# Altium PCB 底盘扩展版.PcbDoc
Units mil, origin at the board's own origin, x right, y up, seen from the top; angles counter-clockwise.
Board outline 2361.05 x 1850 mil, 2 copper layers (Top Layer, Bottom Layer); 38 components, 88 nets, 227 pads, 64 vias.
Unrouted connection lines stored in the file: 37.
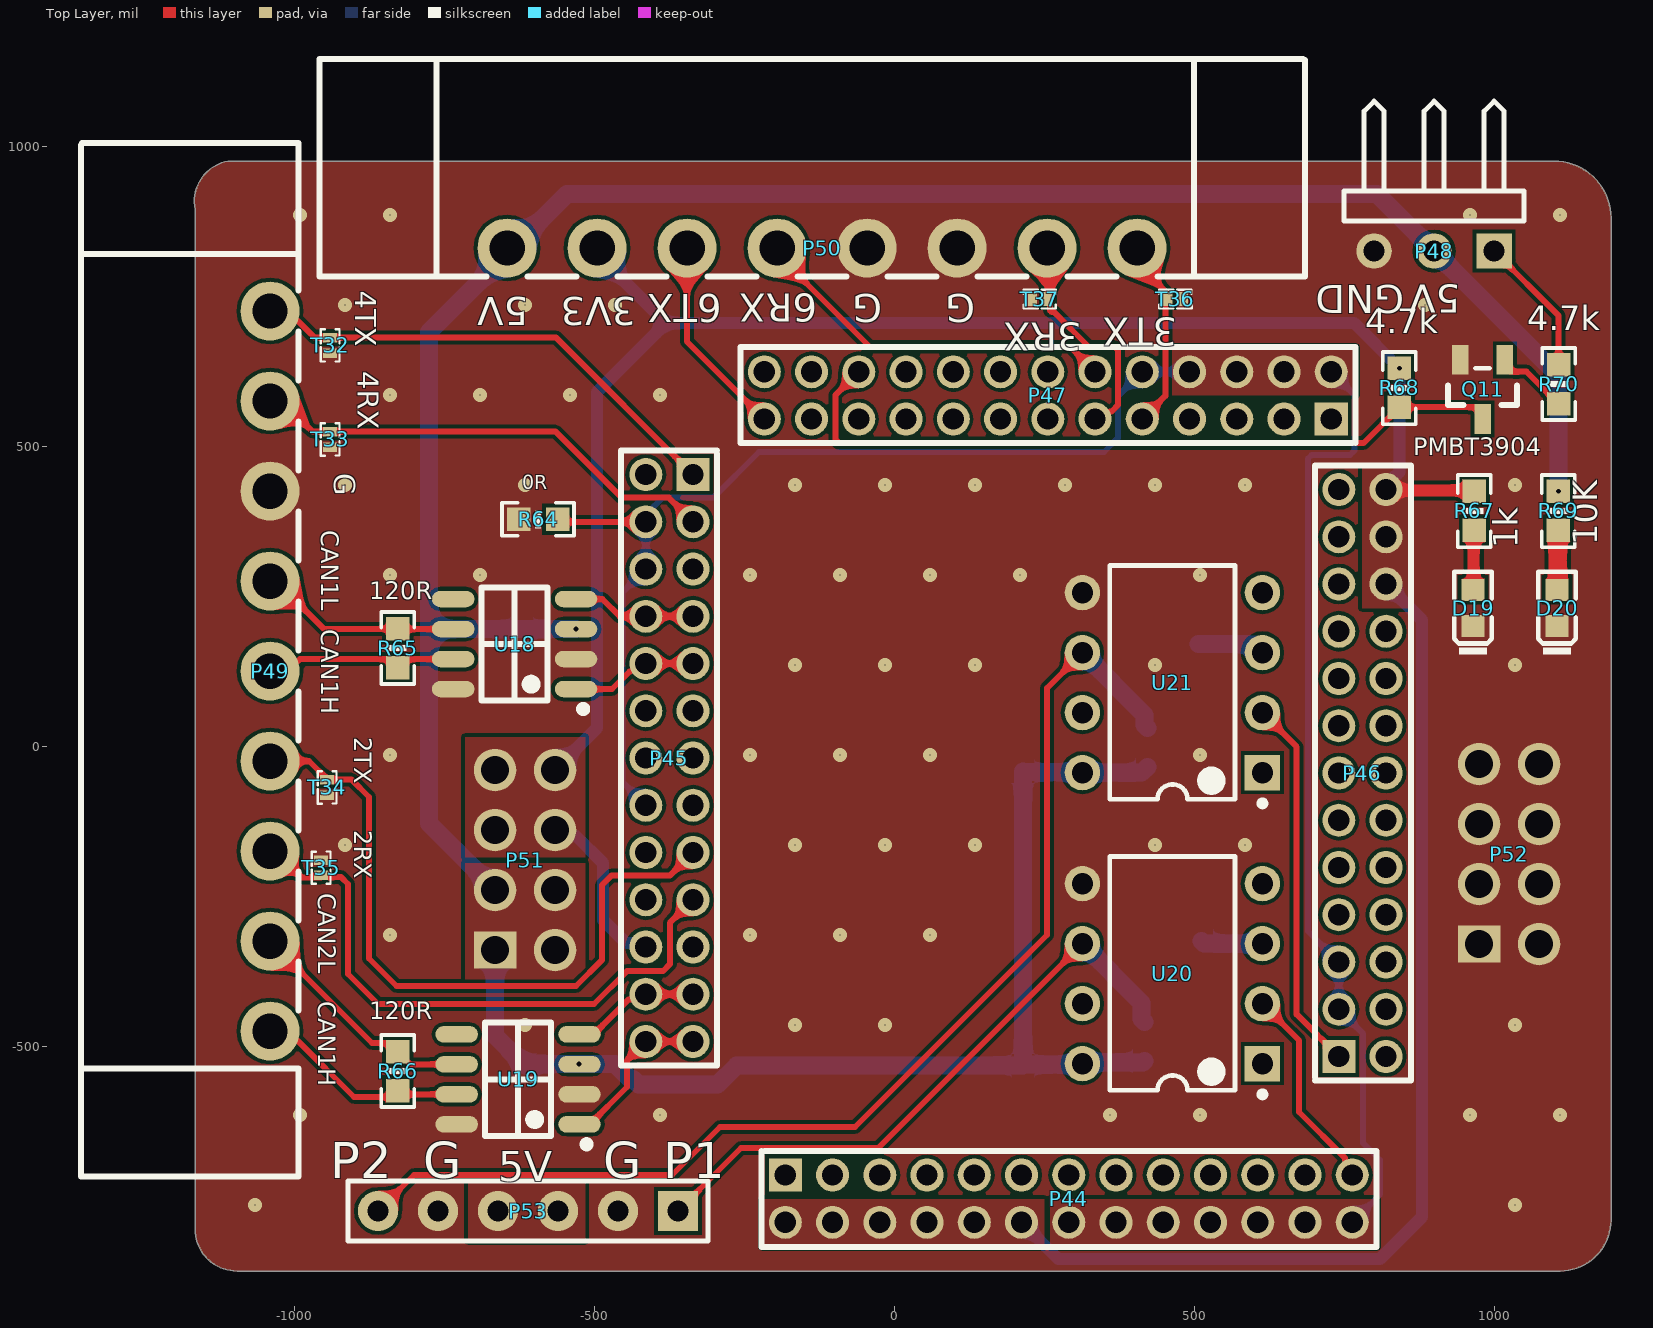
[diagram p0: Top Layer view]
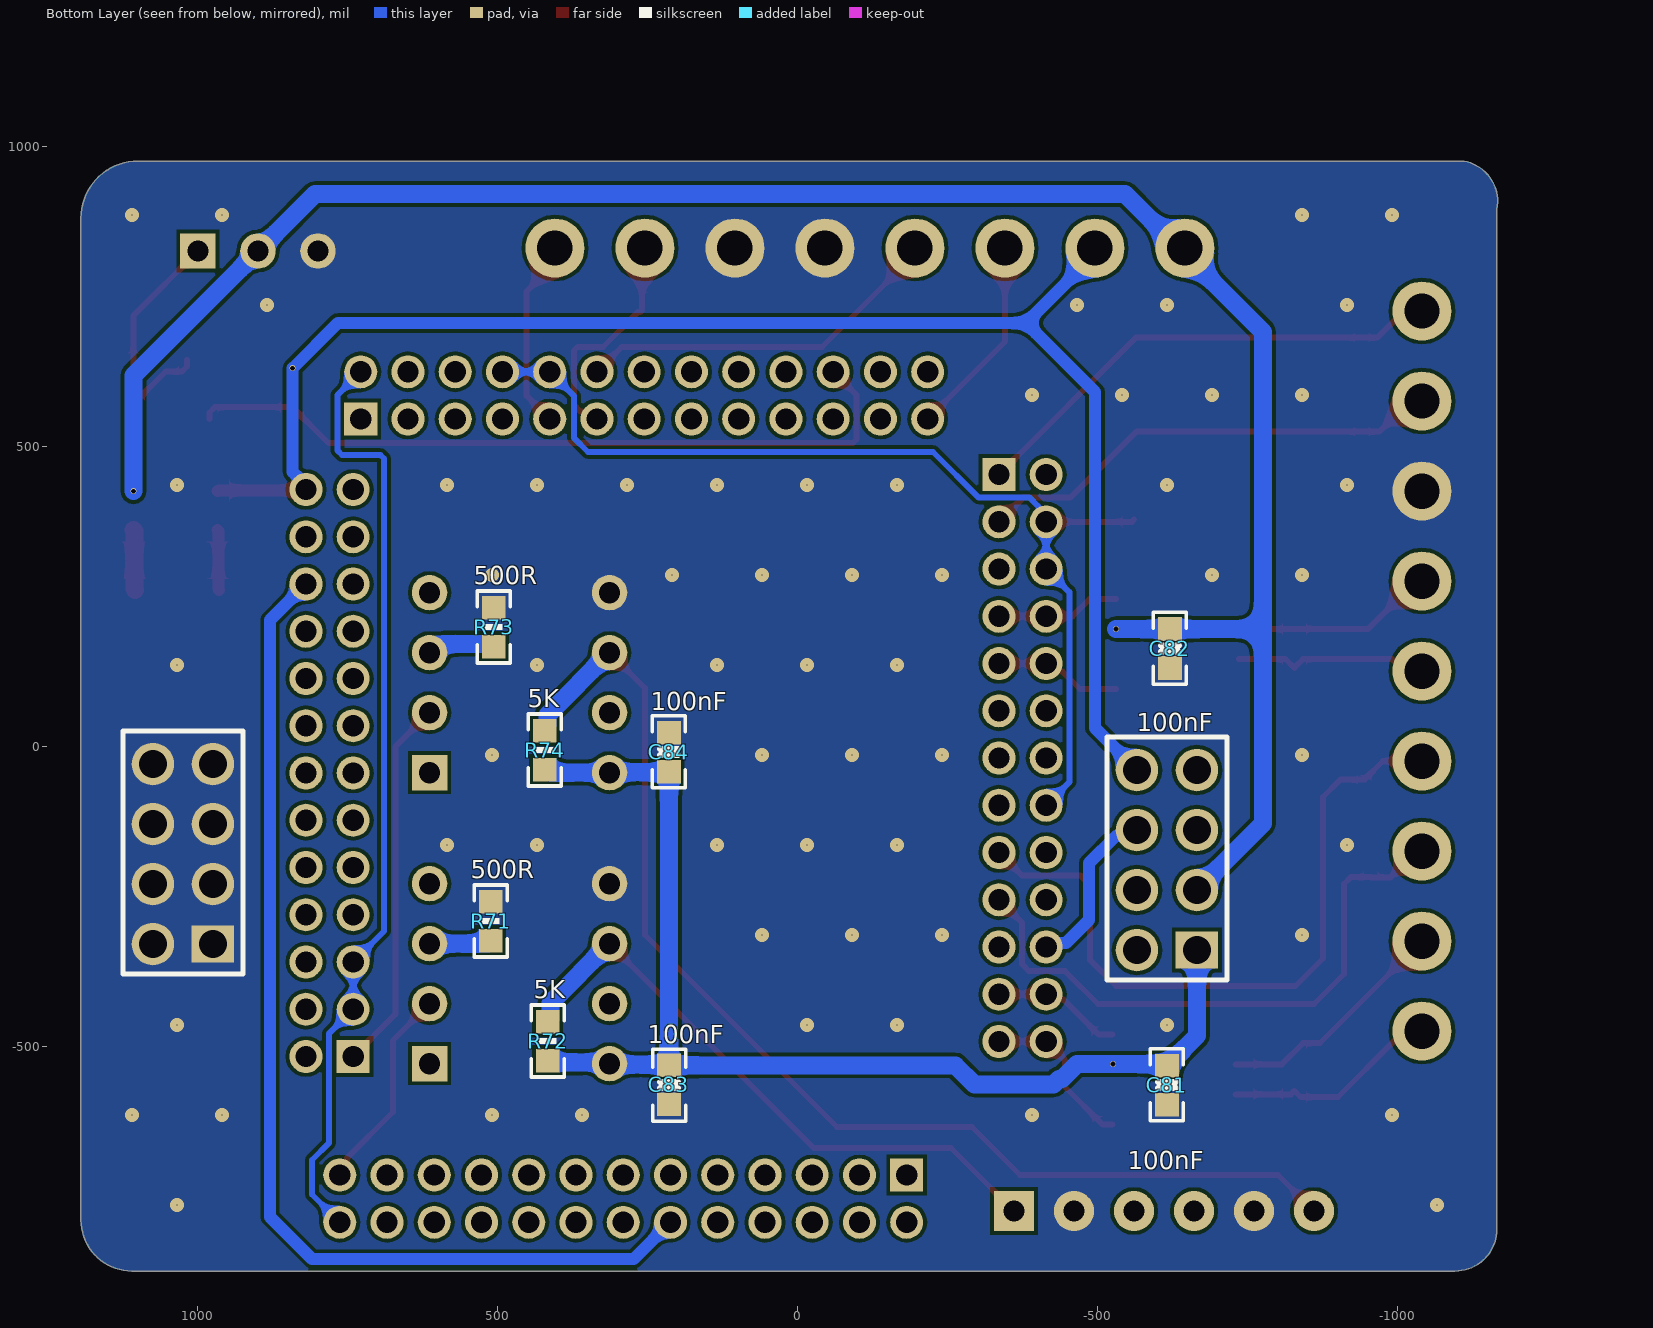
[diagram p1: Bottom Layer view, seen from below]
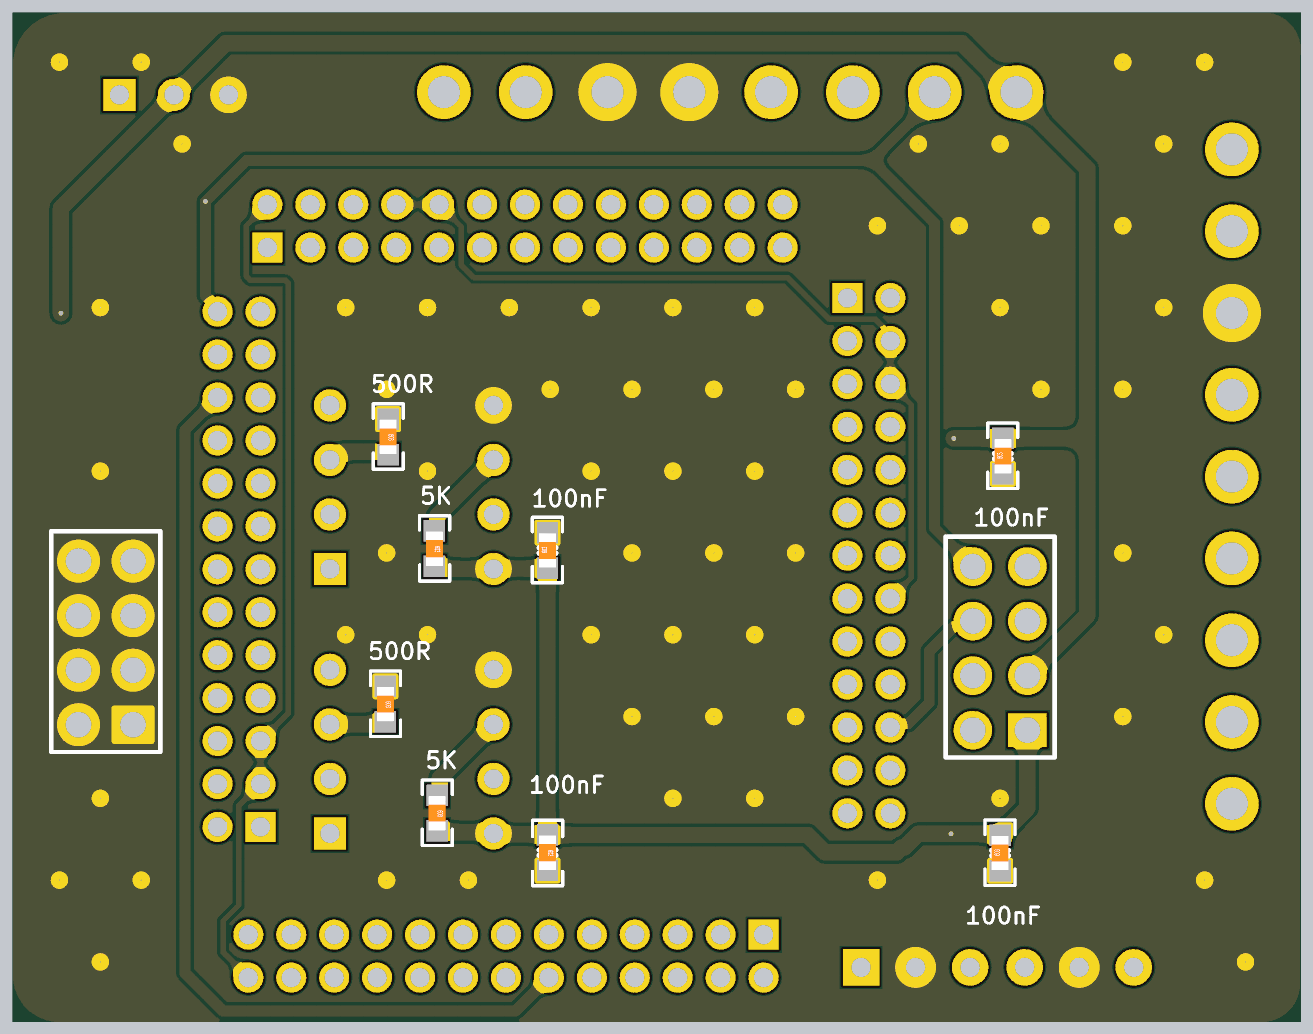
[diagram p2: 3D render of the assembled board from below, using the file's embedded part models]

## Layer stack, top to bottom
Top Solder: solder mask 0.4, Solder Resist, Dk 3.5
Top Layer: signal copper 1.4
Dielectric 1: dielectric 12.6, FR-4, Dk 4.8
Bottom Layer: signal copper 1.4
Bottom Solder: solder mask 0.4, Solder Resist, Dk 3.5

## Board outline
-1165,-805 -1165,895 cw(c-1097.5,907.5) -1110,975 1100,975 cw(c1100,880) 1195,880 1195,-790 cw(c1110,-790) 1110,-875 -1095,-875 cw(c-1095,-805)

## Design rules (kind name [scope] priority, off if disabled: settings)
Clearance [All] p1: gap=6 ignorepadtopadclearanceinfootprint=FALSE
PlaneConnect [All] p1: planeconnectstyle=Direct reliefexpansion=20 reliefentries=4 reliefconductorwidth=10 reliefairgap=10
PolygonConnect PolygonConnect_4 [All vs IsNamedPolygon('3.3V_L01_P005')] p1: thpad.connectstyle=Direct thpad.reliefconductorwidth=10 thpad.reliefentries=4 thpad.polygonreliefangle="90 Angle" thpad.airgapwidth=10 smdpad.connectstyle=Direct smdpad.reliefconductorwidth=10 smdpad.reliefentries=4 smdpad.polygonreliefangle="90 Angle" smdpad.airgapwidth=10 via.connectstyle=Relief via.reliefconductorwidth=10 via.reliefentries=4 via.polygonreliefangle="90 Angle" via.airgapwidth=10
PolygonConnect PolygonConnect_3 [All vs IsNamedPolygon('PGND_L01_P004')] p2: thpad.connectstyle=Direct thpad.reliefconductorwidth=10 thpad.reliefentries=4 thpad.polygonreliefangle="90 Angle" thpad.airgapwidth=10 smdpad.connectstyle=Direct smdpad.reliefconductorwidth=10 smdpad.reliefentries=4 smdpad.polygonreliefangle="90 Angle" smdpad.airgapwidth=10 via.connectstyle=Relief via.reliefconductorwidth=10 via.reliefentries=4 via.polygonreliefangle="90 Angle" via.airgapwidth=10
PolygonConnect PolygonConnect_2 [All vs IsNamedPolygon('3.3V_L01_P002')] p3: thpad.connectstyle=NoConnect thpad.reliefconductorwidth=10 thpad.reliefentries=4 thpad.polygonreliefangle="90 Angle" thpad.airgapwidth=10 smdpad.connectstyle=NoConnect smdpad.reliefconductorwidth=10 smdpad.reliefentries=4 smdpad.polygonreliefangle="90 Angle" smdpad.airgapwidth=10 via.connectstyle=Relief via.reliefconductorwidth=10 via.reliefentries=4 via.polygonreliefangle="90 Angle" via.airgapwidth=10
PolygonConnect PolygonConnect_1 [All vs IsNamedPolygon('PGND_L01_P001')] p4: thpad.connectstyle=Direct thpad.reliefconductorwidth=10 thpad.reliefentries=4 thpad.polygonreliefangle="90 Angle" thpad.airgapwidth=10 smdpad.connectstyle=Direct smdpad.reliefconductorwidth=10 smdpad.reliefentries=4 smdpad.polygonreliefangle="90 Angle" smdpad.airgapwidth=10 via.connectstyle=Relief via.reliefconductorwidth=10 via.reliefentries=4 via.polygonreliefangle="90 Angle" via.airgapwidth=10
PolygonConnect [All] p5: connectstyle=Direct reliefconductorwidth=10 reliefentries=4 polygonreliefangle="90 Angle" airgapwidth=10
RoutingVias [All] p1: holewidth=28 width=50 viastyle="Through Hole" minholewidth=28 minwidth=50 maxholewidth=28 maxwidth=50
SolderMaskExpansion [All] p1: expansion=4 istentingtop=FALSE
Width [All] p1: maxlimit=60 minlimit=10 preferedwidth=30
29 further rules are at their usual default settings.

## Components (designator, comment, footprint, x,y, rotation, side; value= is the part's Value field where it differs from the comment)
C81 "100nF/50V/0603" "0603C  1   2" -615,-565 r0 bottom
C82 "100nF/50V/0603" "0603C  1   2" -620,162.82 r0 bottom
C83 "100nF" "0603C  1   2" 215,-565 r180 bottom
C84 "100nF" "0603C  1   2" 215,-10 r0 bottom
D19 "绿灯 0603" 0603_LED_S1 970,225 r0 top
D20 "绿灯 0603" 0603_LED_S1 1110,225 r0 top
P44 "排针排母" "排针 13*2 2.54 立式 -1" 245,-755 r0 top
P45 "排针排母" "排针 13*2 2.54 立式" -360,-60 r0 top
P46 "排针排母" "排针 13*2 2.54 立式 -2" 801.61,-95.62 r0 top
P47 "排针排母" "排针 13*2 2.54 立式 -3" 221.59,584.24 r0 top
P48 "DBUS" HDR1X3H 1000,825 r180 top
P49 "绿色端子 10P" 绿色端子9p -1117.96,134.81 r0 top
P50 "绿色端子 8P" 绿色端子8p -135,1055 r0 top
P51 "排针排母" HDR-TH_16P-P2.54-V-M-R2-C8-S2.54 -630.51,-203.63 r0 top
P52 "排针排母" HDR-TH_16P-P2.54-V-M-R2-C8-S2.54 1009.49,-193.63 r0 top
P53 "排针排母" 排针6P -610,-775 r0 top
Q11 "PMBT3904" SOT-23(SOT-23-3) 980,595 r0 top
R64 "0R" 0603(偏大) -595,375 r0 top
R65 "120R/1%/0603" 0603(偏大) -830,165 r270 top
R66 "120R/1%/0603" 0603(偏大) -830,-540 r270 top
R67 "1K" 0603(偏大) 970,390 r90 top
R68 "4.7k/1%/0603" 0603(偏大) 845,595 r90 top
R69 "10K" 0603(偏大) 1110,390 r90 top
R70 "4.7k/1%/0603" 0603(偏大) 1105,605 r270 top
R71 "200R" 0603(偏大) 515,-290 r270 bottom
R72 "5K" 0603(偏大) 420,-490 r270 bottom
R73 "200R" 0603(偏大) 510,200 r270 bottom
R74 "5K" 0603(偏大) 425,-5 r270 bottom
T32 "PESD5V0V1BL" ESD -940,666.74 r0 top
T33 "PESD5V0V1BL" ESD -940,510 r0 top
T34 "PESD5V0V1BL" ESD -945,-70 r0 top
T35 "PESD5V0V1BL" ESD -955,-201.74 r180 top
T36 "PESD5V0V1BL" ESD 470,745 r90 top
T37 "PESD5V0V1BL" ESD 241.74,745 r270 top
U18 "CAN/TJA1040T/CM" SOIC-8_150mil -660.79,140.51 r0 top
U19 "CAN/TJA1040T/CM" SOIC-8_150mil -655,-585 r0 top
U20 "6N135_C255739" 光耦 475,-385 r0 top
U21 "6N135_C255739" 光耦 475,100 r0 top

## Footprints (in the part's own frame and the unit in brackets; to place one, negate y for a bottom-side part, rotate by r counter-clockwise, add the part's x,y. Pads: shape width x height; smd on the part's side, far side on the other; paste and mask are expansions set on the pad)
0603(偏大) [mm]
  rect 1x1 smd: 1(-0.77,0.069) 2(0.881,0.069)
  silkscreen extent -1.48,-0.62 1.57,0.78, body extent -0.74,-0.33 0.86,0.47, height 0.3
0603_LED_S1 [mm]
  rect 0.98x0.93 smd: A(-0.127,0.897) K(-0.127,-0.643)
  silkscreen extent -0.92,-1.85 0.66,1.66, body extent -0.53,-0.67 0.27,0.93, height 0.6
"0603C  1   2" [mm]
  rect 1x1 smd: 1(0,-0.817) 2(0,0.834)
  silkscreen extent -0.69,-1.53 0.71,1.52, body extent -0.4,-0.79 0.4,0.81, height 0.3
ESD [mm]
  rect 0.6x0.4 smd: 1(0,0.352) 2(0,-0.298)
  silkscreen extent -0.4,-0.66 0.4,0.71
HDR1X3H [mm] "Connector; Header; 3 Position; Right Angle"
  rect 1.5x1.5 hole 0.9: 1(0,0)
  round 1.5 hole 0.9: 2(2.54,0) 3(5.08,0)
  silkscreen extent -1.27,-6.35 6.35,-1.27
HDR-TH_16P-P2.54-V-M-R2-C8-S2.54 [mm]
  rect 1.8x1.575 hole 1.2: 1(-0.876,-3.464)
  round 1.8 hole 1.2: 2(-0.876,-0.924) 3(-0.876,1.616) 4(-0.876,4.156) 5(1.664,4.156) 6(1.664,1.616) 7(1.664,-0.924) 8(1.664,-3.464)
SOIC-8_150mil [mm]
  oval 1.8x0.7 smd: 1(3.322,-1.156) 2(3.322,0.114) 3(3.322,1.384) 4(3.322,2.654) 5(-1.878,2.654) 6(-1.878,1.384) 7(-1.878,0.114) 8(-1.878,-1.156)
  silkscreen extent -0.68,-2.15 3.77,3.15, body extent -2.2,-1.77 3.84,3.25, height 1.6
SOT-23(SOT-23-3) [mm]
  rect 0.7x1.25 smd: 1(0.97,1.231) 2(-0.93,1.231) 3(0.02,-1.269)
  silkscreen extent -1.44,-0.67 1.48,0.88, body extent -1.48,-1.52 1.52,1.48, height 1.3
光耦 [mm]
  rect 1.5x1.5 hole 0.9: 1(3.531,-3.667)
  round 1.5 hole 0.9: 2(3.531,-1.127) 3(3.531,1.413) 4(3.531,3.953) 5(-4.089,3.953) 6(-4.089,1.413) 7(-4.089,-1.127) 8(-4.089,-3.667)
  silkscreen extent -2.93,-5.09 3.65,5.1
排针6P [mm]
  rect 1.7x1.7 hole 0.9: 1(6.35,0)
  round 1.7 hole 0.9: 2(3.81,0) 3(1.27,0) 4(-1.27,0) 5(-3.81,0) 6(-6.35,0)
  silkscreen extent -7.62,-1.27 7.62,1.27
"排针 13*2 2.54 立式" [mm]
  rect 1.4x1.4 hole 0.9: 1(0.635,13.016)
  round 1.4 hole 0.9: 2(0.635,11.016) 3(0.635,9.016) 4(0.635,7.016) 5(0.635,5.016) 6(0.635,3.016) 7(0.635,1.016) 8(0.635,-0.984) 9(0.635,-2.984) 10(0.635,-4.984) 11(0.635,-6.984) 12(0.635,-8.984) 13(0.635,-10.984) 14(-1.365,-10.984) 15(-1.365,-8.984) 16(-1.365,-6.984) 17(-1.365,-4.984) 18(-1.365,-2.984) 19(-1.365,-0.984) 20(-1.365,1.016) 21(-1.365,3.016) 22(-1.365,5.016) 23(-1.365,7.016) 24(-1.365,9.016) 25(-1.365,11.016) 26(-1.365,13.016)
  silkscreen extent -2.41,-12 1.65,14.03
"排针 13*2 2.54 立式 -1" [mm]
  round 1.4 hole 0.9: 1(-10.826,-0.984) 2(-8.826,-0.984) 3(-6.826,-0.984) 4(-4.826,-0.984) 5(-2.826,-0.984) 6(-0.826,-0.984) 7(1.174,-0.984) 8(3.174,-0.984) 9(5.174,-0.984) 10(7.174,-0.984) 11(9.174,-0.984) 12(11.174,-0.984) 13(13.174,-0.984) 14(13.174,1.016) 15(11.174,1.016) 16(9.174,1.016) 17(7.174,1.016) 18(5.174,1.016) 19(3.174,1.016) 20(1.174,1.016) 21(-0.826,1.016) 22(-2.826,1.016) 23(-4.826,1.016) 24(-6.826,1.016) 25(-8.826,1.016)
  rect 1.4x1.4 hole 0.9: 26(-10.826,1.016)
  silkscreen extent -11.84,-2.03 14.19,2.03
"排针 13*2 2.54 立式 -2" [mm]
  rect 1.4x1.4 hole 0.9: 1(-1.533,-10.713)
  round 1.4 hole 0.9: 2(-1.533,-8.713) 3(-1.533,-6.713) 4(-1.533,-4.713) 5(-1.533,-2.713) 6(-1.533,-0.713) 7(-1.533,1.287) 8(-1.533,3.287) 9(-1.533,5.287) 10(-1.533,7.287) 11(-1.533,9.287) 12(-1.533,11.287) 13(-1.533,13.287) 14(0.467,-10.713) 15(0.467,-8.713) 16(0.467,-6.713) 17(0.467,-4.713) 18(0.467,-2.713) 19(0.467,-0.713) 20(0.467,1.287) 21(0.467,3.287) 22(0.467,5.287) 23(0.467,7.287) 24(0.467,9.287) 25(0.467,11.287) 26(0.467,13.287)
  silkscreen extent -2.55,-11.73 1.52,14.31
"排针 13*2 2.54 立式 -3" [mm]
  rect 1.4x1.4 hole 0.9: 1(12.881,-0.997)
  round 1.4 hole 0.9: 2(10.881,-0.997) 3(8.881,-0.997) 4(6.881,-0.997) 5(4.881,-0.997) 6(2.881,-0.997) 7(0.881,-0.997) 8(-1.119,-0.997) 9(-3.119,-0.997) 10(-5.119,-0.997) 11(-7.119,-0.997) 12(-9.119,-0.997) 13(-11.119,-0.997) 14(2.881,1.003) 15(0.881,1.003) 16(-1.119,1.003) 17(-3.119,1.003) 18(-5.119,1.003) 19(-7.119,1.003) 20(-9.119,1.003) 21(-11.119,1.003) 22(12.881,1.003) 23(10.881,1.003) 24(8.881,1.003) 25(6.881,1.003) 26(4.881,1.003)
  silkscreen extent -12.14,-2.01 13.9,2.05
绿色端子8p [mm]
  round 2.5 hole 1.5: 1(13.716,-5.715) 2(9.906,-5.715) 3(6.096,-5.715) 4(2.286,-5.715) 5(-1.524,-5.715) 6(-5.334,-5.715) 7(-9.144,-5.715) 8(-12.954,-5.715)
  silkscreen extent -20.9,-6.92 20.84,2.29
绿色端子9p [mm]
  round 2.5 hole 1.5: 1(1.98,14.991) 2(1.98,11.181) 3(1.98,7.371) 4(1.98,3.561) 5(1.98,-0.249) 6(1.98,-4.059) 7(1.98,-7.869) 8(1.98,-11.679) 9(1.98,-15.489)
  silkscreen extent -6.02,-21.65 3.18,22.11

## Part data
C81 C82 C83 C84: library part C
D19 D20: library part "0603 绿灯", "发光二极管", Package=0603, SuppliersPartNumber=C72043, ComponentLink1Description=供应商链接, ComponentLink1URL=http://www.szlcsc.com/product/details_73152.html, Supplier=LC
P44 P45 P46 P47: library part 13*2排针
P48: library part "Header 3", "Header, 3-Pin", LatestRevisionDate=17-Jul-2002, LatestRevisionNote="Re-released for DXP Platform.", Publisher="Altium Limited"
P53: library part 6p排针
Q11: library part "SOT-23 SS8050 Y1", "三极管", Package=SOT-23, SuppliersPartNumber=C2150, ComponentLink1Description=供应商链接, ComponentLink1URL=http://www.szlcsc.com/product/details_2507.html, Supplier=LC
R64: library part R_1
R65 R66 R67 R68 R69 R70 R71 R72 R73 R74: library part R
T32 T33 T34 T35 T36 T37: library part ESD
U18 U19: library part CAN/TJA1040T/CM_[C6951], "CAN", Package=SOIC-8_150mil, SuppliersPartNumber=C6951, ComponentLink1Description=供应商链接, ComponentLink1URL=http://www.szlcsc.com/product/details_7423.html, Supplier=LC
U20 U21: BOM_Manufacturer="Isocom Components", BOM_Manufacturer Part=6N135, BOM_Supplier=LCSC, BOM_Supplier Part=C255739, Contributor=LCSC, spicePre=U, spiceSymbolName=6N135_C255739

## Via types
v1: diameter 24, hole 2, Top Layer to Bottom Layer, 60 vias
v2: diameter 18/10 (per signal layer), hole 8, Top Layer to Bottom Layer, tented both sides, 4 vias

## Nets (pads, with @x,y where several pads share a name; then routed paths per layer and width w, separated by ;. In a path a pad name is that pad's centre, name@x,y a point inside that pad or via, vN(x,y) a via of type N, cw(c..) or ccw(c..) an arc to the next point about the centre after c; other vN are vias at no path point)
3.3V: P44.1 P44.2 P44.3 P44.4 P44.5 P44.6 P45.16 P46.24 P46.25 P46.26 P50.7 P51.3 P51.4 P51.5 P51.6 R67.2 R68.2 | length 4687.1
  Top Layer w20: P46.26 821.4,426.08 965.89,426.08 R67.2
  Bottom Layer w20: P51.6 -555.27,-149.73 -530.27,-149.73 -485,-195 -485,-290 -446.76,-328.24 -420.46,-328.24 P45.16 ; P51.5 -495,30 -495,590 -380,705 ; P50.7@-495,820 -380,705 ; P44.6 273.74,-855 810,-855 880,-785 880,210 P46.24 ; P46.26 820,434.46 842.3,456.76 v2(842.3,629.67) 766.97,705 -380,705
CAN1_H: P49.5 R65.2 U18.7 | length 325.7
  Top Layer w10: P49.5 -1023.08,141.92 -993.01,141.92 -989.93,145 -841.97,145 R65.2 -812.62,145 U18.7
CAN1_L: P49.4 R65.1 U18.6 | length 338.4
  Top Layer w10: P49.4 -1030,275 -950.33,195.33 R65.1 -826.97,195 U18.6
CAN1_RX(PD0): P45.4 P45.23 U18.4 | length 206.9
  Top Layer w10: U18.4 -486.14,245 -457.36,216.22 P45.4
CAN1_TX(PD1): P45.5 P45.22 U18.1 | length 212.6
  Top Layer w10: U18.1 -470,95 -440.72,124.28 -439.15,124.28 -425.95,137.48 P45.5
CAN2_H: P49.9 R66.2 U19.7 | length 363.3
  Top Layer w10: P49.9 -1023.08,-491.92 -993.08,-491.92 -900,-585 -837.62,-585 R66.2 -821.46,-580.51 U19.7
CAN2_L: P49.8 R66.1 U19.6 | length 396.2
  Top Layer w10: P49.8 -870,-495 -841.97,-495 -806.46,-530.51 U19.6
CAN2_RX(PB5): P45.12 P45.15 U19.4 | length 216.9
  Top Layer w10: U19.4 -500.51,-480.51 -442.33,-422.33 -422.37,-422.33 P45.15 P45.12
CAN2_TX(PB6): P45.13 P45.14 U19.1 | length 272.5
  Top Layer w10: U19.1 -507.31,-630.51 -445,-568.2 -445,-523.7 P45.14 P45.13
GND: C81.2 C82.2 C83.1 C84.1 D19.K D20.K P48.3 P49.3 P50.3 P50.4 P52.1 P52.2 P52.3 P52.4 P52.5 P52.6 P52.7 P52.8 P53.2 P53.5 Q11.2 R64.1 R71.1 R73.1 T32.2 T33.2 T34.2 T35.2 T36.2 T37.2 U18.2 U18.8 U19.2 U19.8 U20.5 U21.5
  other v1: -1065,-765 1035,-765 -990,-615 -390,-615 360,-615 510,-615 960,-615 1110,-615 -615,-465 -165,-465 -15,-465 1035,-465 -840,-315 -240,-315 -90,-315 60,-315 -915,-165 -165,-165 -15,-165 135,-165 435,-165 585,-165 -840,-15 -240,-15 -90,-15 60,-15 510,-15 -165,135 -15,135 135,135 435,135 1035,135 -840,285 -690,285 -240,285 -90,285 60,285 210,285 510,285 -915,435 -615,435 -165,435 -15,435 135,435 285,435 435,435 585,435 1035,435 -840,585 -690,585 -540,585 -390,585 -915,735 -615,735 -465,735 885,735 -990,885 -840,885 960,885 1110,885
NetD19_A: D19.A R67.1 | length 100.3
  Top Layer w20: D19.A 966.15,261.46 966.15,358.52 R67.1
NetD20_A: D20.A R69.1 | length 100.3
  Top Layer w30: D20.A 1106.15,261.46 1106.15,358.52 R69.1
NetP48_1: P48.1 R70.1 | length 234.3
  Top Layer w10: P48.1 1107.7,717.3 R70.1
NetQ11_1: Q11.1 R70.2 | length 126.2
  Top Layer w10: Q11.1 1018.19,632.64 1026.97,623.86 1054.17,623.86 R70.2
NetR71_2: R71.2 U20.3 | length 103.7
  Bottom Layer w30: R71.2 516.99,-329.37 U20.3
NetR73_2: R73.2 U21.3 | length 112.9
  Bottom Layer w30: R73.2@507.3,170.01 529.24,170.01 529.55,170.33 591.45,170.33 606.15,155.63 U21.3
PA0: P44.16
PA1: P44.15
PA4: P46.4
PA5: P46.5
PA8: P47.17
PA9: P47.18
PA11: P47.20
PA12: P47.21
PA15: P45.26
PB0: P46.10
PB1: P46.11
PB2: P46.12
PB3: P45.21
PB4: P45.20
PB8: P45.18
PB9: P45.17
PB10: P46.22
PB11: P46.23
PB12: P47.1
PB13: P47.2
PB14: P47.3
PB15: P47.4
PC0: P44.20
PC1: P44.19
PC2: P44.18
PC3: P44.17
PC4: P46.8
PC5: P46.9
PC8: P47.15
PC9: P47.16
PC12: P45.3
PC13: P44.24
PC14: P44.23
PC15: P44.22
PD2: P45.6
PD3: P45.7
PD4: P45.8
PD7: P45.11
PD10: P47.7
PD11: P47.8
PD12: P47.9
PD13: P47.10
PD14: P47.11
PD15: P47.12
PE5: P44.26
PE6: P44.25
PE7: P46.13
PE8: P46.14
PE9: P46.15
PE10: P46.16
PE11: P46.17
PE12: P46.18
PE13: P46.19
PE14: P46.20
PE15: P46.21
PGND: P44.7 P44.8 P44.9 P44.10 P44.11 P44.12 P44.13 P45.19 P45.24 P45.25 P46.2 P46.3 P47.22 P47.23 P47.24 P47.25 P47.26 R64.2 | length 3282.7
  Top Layer w10: R64.2 -556.33,373.7 P45.25
  Bottom Layer w10: P45.19 -452.3,-60.18 -452.3,256.4 P45.24 -413.74,385.91 -399.93,399.73 -399.93,400.07 -386.12,413.88 -301.12,413.88 -225,490 350,490 373.56,513.56 373.56,583.56 P47.26 P47.25 ; P47.22 767.26,585.18 767.26,492.26 760,485 695.86,485 690,479.14 690,-308.66 P46.3 P46.2 781.44,-478.84 781.44,-661.44 810,-690 810,-747.4 P44.13
PWM1: P53.1 R72.1 U20.6 | length 1031.7
  Top Layer w10: P53.1 -255,-670 -26.62,-670 U20.6
  Bottom Layer w30: U20.6 412.61,-427.97 412.61,-454.99 R72.1
PWM2: P53.6 R74.1 U21.6 | length 1970.8
  Top Layer w10: P53.6 -800,-715 -370,-715 -290,-635 -65,-635 255,-315 255,96.62 U21.6
  Bottom Layer w30: U21.6 417.61,52.03 417.61,35.01 R74.1@422.3,30.33
TIM3_CH1(PA6): P46.6
TIM3_CH2(PA7): P46.7
TIM5_CH3(PA2): P44.14 U20.2 | length 347.6
  Top Layer w10: U20.2 675,-490.36 675,-610 751.74,-686.74 751.74,-690.87 763.66,-702.79 P44.14
TIM5_CH4(PA3): P46.1 U21.2 | length 625.7
  Top Layer w10: U21.2 671.05,-1.4 671.05,-447.19 P46.1
USART1_RX(PA10): P47.19 Q11.3 R68.1 | length 1248.5
  Top Layer w10: P47.19 -97.26,585.18 -97.26,510.86 -91.4,505 782.62,505 R68.1 971.98,564.67 980.79,555.87 Q11.3
USART2_RX(PD6): P45.10 P49.7 T35.1 | length 1010.9
  Top Layer w10: P49.7 -1031.15,-175 -987.29,-218.85 T35.1@-955,-218.85 ; T35.1@-955,-218.46 -921.54,-218.46 -910,-230 -910,-380 -860,-430 -500,-430 -445.14,-375.14 -385.14,-375.14 -373.56,-363.56 -373.56,-294.78 P45.10
USART2_TX(PD5): P45.9 P49.6 T34.1 | length 1184.4
  Top Layer w10: P49.6 -975.09,-25 T34.1@-943.94,-56.15 ; T34.1 T34.1@-943.94,-56.15 ; P45.9 -373.56,-216.04 -471.04,-216.04 -486.93,-231.93 -486.93,-356.93 -530,-400 -829.14,-400 -875,-354.14 -875,-85 -903.85,-56.15 T34.1@-943.94,-56.15
USART3_RX(PD9): P47.6 P50.2 T37.1 | length 372.2
  Top Layer w10: P50.2@255,820 260,815 260,730 ; 260,726.06 262.87,723.19 266.81,723.19 325,665 367.7,665 373.56,659.14 373.56,568.56 362.59,557.59 359.8,557.59 347.21,545 P47.6
USART3_TX(PD8): P47.5 P50.1 T36.1 | length 310.6
  Top Layer w10: P50.1@405,820 405,805 452.3,757.7 452.3,742.67 452.28,730 452.28,717.35 452.3,583.56 P47.5
USART4_RX(PC11): P45.2 P49.2 T33.1 | length 788.4
  Top Layer w10: P49.2 -1020,575 -968.85,523.85 T33.1 -563.85,523.85 -453.88,413.88 -375.18,413.88 P45.2
USART4_TX(PC10): P45.1 P49.1 T32.1 | length 817.9
  Top Layer w10: P49.1 -1023.08,708.08 -993.08,708.08 -965.59,680.59 -563.15,680.59 P45.1
USART6_RX(PC7): P47.14 P50.5 | length 611.3
  Top Layer w10: P50.5@-195,820 -40,665 293.74,665 P47.14
USART6_TX(PC6): P47.13 P50.6 | length 328.4
  Top Layer w10: P50.6@-345,820 -345,673.82 P47.13
VOUT-5V: C81.1 C82.1 C83.2 C84.2 P48.2 P50.8 P51.1 P51.2 P51.7 P51.8 P53.3 P53.4 R69.2 R72.2 R74.2 U18.3 U19.3 U20.8 U21.8 | length 5494.2
  Bottom Layer w30: P51.1 -665,-482.82 C81.1 -612.18,-530 v2(-525,-530) -464.85,-530 -439.85,-555 -435,-555 -426,-564 -294,-564 -262.18,-532.18 C83.2 C83.2@216.41,-530.78 ; P51.2 -665,-239.12 -775,-129.12 -775,195 ; v2(-530,195) C82.1 -775,195 ; R72.2 414.95,-527.02 316.36,-527.02 U20.8 312.6,-530.78 C83.2@216.41,-530.78 ; R74.2@422.3,-34.67 412.6,-44.37 U21.8 313.23,-43.59 215.78,-43.59 C84.2 215,-529.37 C83.2@216.41,-530.78 ; v2(1107.3,424.67) 1107.3,617.7 P48.2 805,920 -545,920 -645,820 -775,690 -775,195
pads on no net: P44.21 U18.5 U19.5 U20.1 U20.4 U20.7 U21.1 U21.4 U21.7

## Polygon pours and split planes (outlines as drawn)
GND on Top Layer "GND_L01_P010" (solid, pour order 10): -1165,-805 -1165,895 cw(c-1097.5,907.5) -1110,975 1100,975 cw(c1100,880) 1195,880 1195,-790 cw(c1110,-790) 1110,-875 -1095,-875 cw(c-1095,-805)
3.3V on Top Layer "3.3V_L01_P009" (solid, pour order 9): -715,15 -515,15 -515,-185 -715,-185
VOUT-5V on Top Layer "VOUT-5V_L01_P008" (solid, pour order 8): -715,-195 -515,-195 -515,-390 -715,-390
VOUT-5V on Top Layer "VOUT-5V_L01_P007" (solid, pour order 7): -710,-725 -710,-825 -515,-825 -515,-725
3.3V on Top Layer "3.3V_L01_P006" (solid, pour order 6): 250,-755 -220,-755 -220,-835 250,-835
3.3V on Top Layer "3.3V_L01_P005" (solid, pour order 5): 780,465 780,230 860,230 860,465
PGND on Top Layer "PGND_L01_P004" (solid, pour order 4): 260,-755 260,-835 805,-835 805,-755
PGND on Top Layer "PGND_L01_P001" (solid, pour order 1): 770,585 460,585 460,665 770,665
GND on Bottom Layer "GND_L02_P011" (solid, pour order 11): -1165,-805 -1165,895 cw(c-1097.5,907.5) -1110,975 1100,975 cw(c1100,880) 1195,880 1195,-790 cw(c1110,-790) 1110,-875 -1095,-875 cw(c-1095,-805)

## Silkscreen, mask and mechanical layers (free items; w line width, h text height)
Top Overlay:
  text "5V" at 943.76,784.98 h80 r180
  text "GND" at 850,784.04 h80 r180
  text "6TX" at -287.04,768.54 h80 r180
  text "6RX" at -127.74,769.3 h80 r180
  text "G" at -20,769.04 h80 r180
  text "G" at 135,769.04 h80 r180
  text "5V" at -610,764.04 h80 r180
  text "3V3" at -430,764.04 h80 r180
  text "4TX" at -909.47,758.5 h60 r270
  text "3TX" at 472.28,729.25 h80 r180
  text "3RX" at 312.71,721.07 h80 r180
  text "4.7k" at 1055,680 h70
  text "4.7k" at 785,675 h70
  text "4RX" at -905.82,624.36 h60 r270
  text "PMBT3904" at 865,475 h50
  text "G" at -944.28,455 h60 r270
  text "0R" at -620,420 h40
  text "CAN1L" at -964.45,360 h50 r270
  text "10K" at 1185,334.38 h70 r90
  text "1k" at 1052.48,330 h70 r90
  text "120R" at -875,235 h50
  text "CAN1H" at -964.45,195 h50 r270
  text "2TX" at -910,15 h50 r270
  text "2RX" at -910,-140 h50 r270
  text "CAN2L" at -970,-245 h50 r270
  text "CAN1H" at -970,-425 h50 r270
  text "120R" at -875,-465 h50
  text "P2" at -940,-720 h60
  text "G" at -785,-720 h60
  text "G" at -485,-720 h60
  text "P1" at -385,-720 h60
  text "5V" at -660,-725 h50
Bottom Overlay:
  text "500R" at 540,270 h30
  text "5K" at 450,65 h30
  text "100nF" at 245,60 h30
  text "100nF" at -565,25 h30
  text "500R" at 545,-220 h30
  text "5K" at 440,-420 h30
  text "100nF" at 250,-495 h30
  text "100nF" at -550,-705 h30
Mechanical 1:
  lines w10: -1165,-805 ccw(c-1095,-805) -1095,-875 1110,-875 ccw(c1110,-790) 1195,-790 1195,880 ccw(c1100,880) 1100,975 170,975 -1110,975 ccw(c-1097.5,907.5) -1165,895 -1165,-805